# Altium PCB Bakplan2_Lynx.PcbDoc
Units mm, origin at the board's own origin, x right, y up, seen from the top; angles counter-clockwise.
Board outline 145 x 75 mm, 2 copper layers (Top Layer, Bottom Layer); 6 components, 64 nets, 260 pads, 0 vias.
Unrouted connection lines stored in the file: 1.
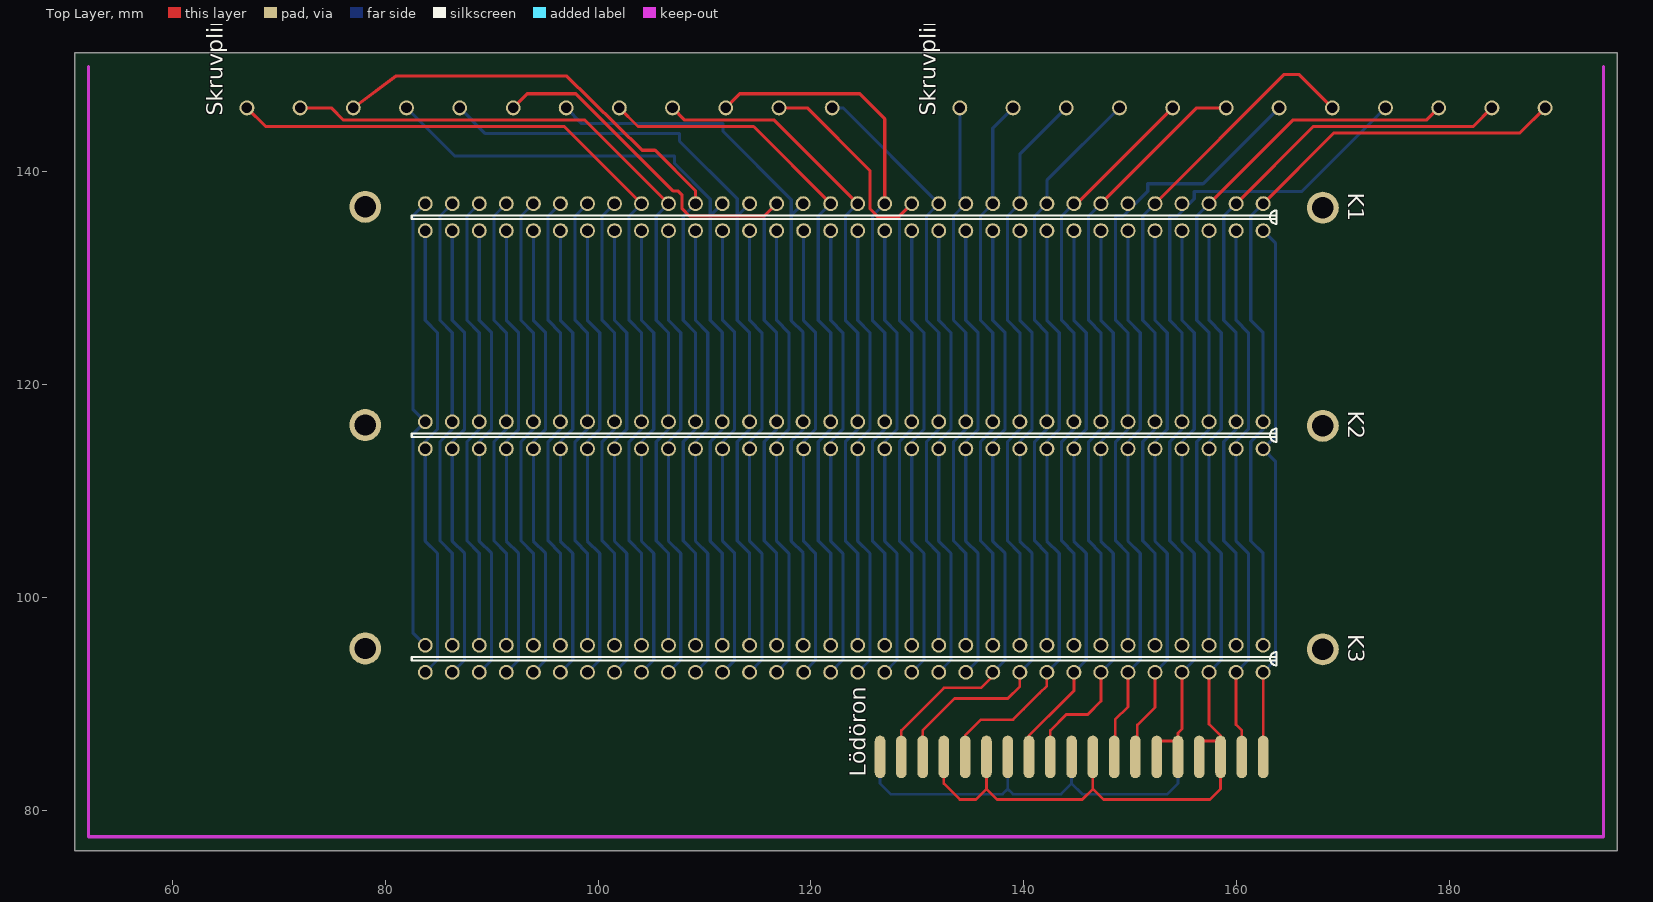
[diagram p0: Top Layer view]
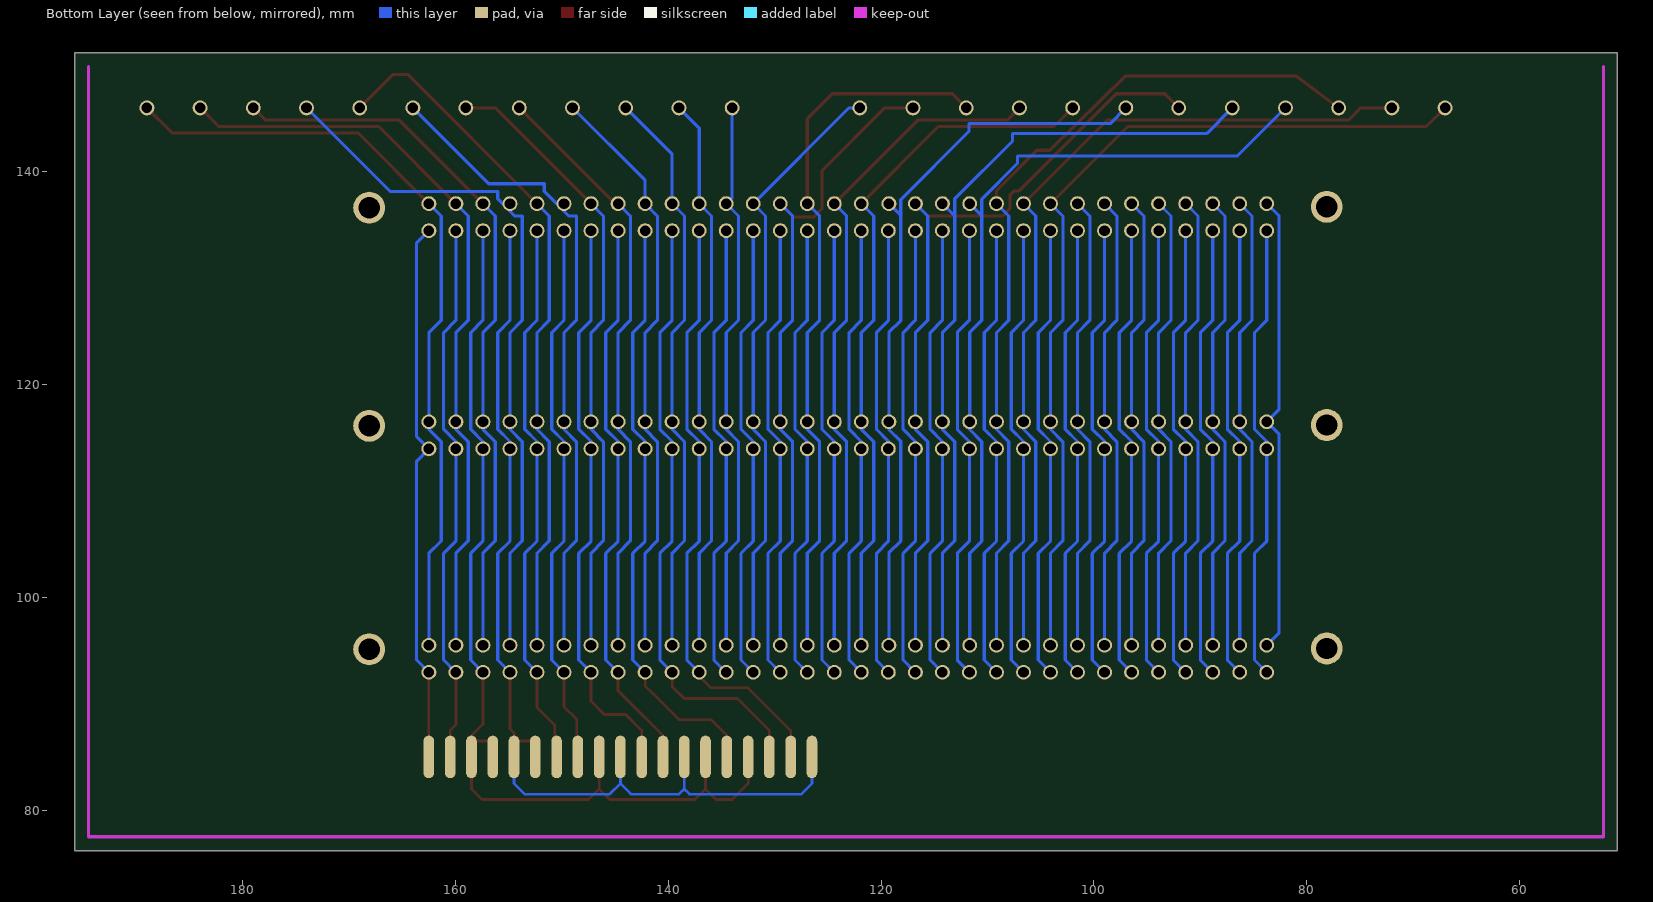
[diagram p1: Bottom Layer view, seen from below]

## Layer stack, top to bottom
Top Layer: signal copper 0.0356
Dielectric: dielectric 0.32, FR-4, Dk 4.8
Bottom Layer: signal copper 0.0356

## Board outline
50.8,76.2 195.8,76.2 195.8,151.2 50.8,151.2

## Design rules (kind name [scope] priority, off if disabled: settings)
Clearance [All] p1: gap=0.3
ComponentClearance [All] p1: gap=0.254 collisioncheckmode=0
PolygonConnect [All] p1: connectstyle=Relief reliefconductorwidth=0.254 reliefentries=4 polygonreliefangle="90 Angle"
RoomDefinition Schema2_bakplan_Lynx [InComponentClass('Schema2_bakplan_Lynx')] p1: confinementstyle=ConfineIn formatcopy=TRUE outline 198.5,79 262.499,79 262.499,176.5 198.5,176.5
RoutingLayers [All] p1: top layer=Horizontal bottom layer=Vertical
RoutingVias [All] p1: holewidth=0.8 width=1.6 viastyle="Through Hole" minholewidth=0.711 minwidth=1.27 maxholewidth=0.711 maxwidth=1.27
SolderMaskExpansion [All] p1: expansion=0.102
TestPointUsage [All] p1: valid=0 allowmultiple=FALSE
Testpoint [All] p1: side=15 testpointundercomponent=TRUE minsize=1.016 maxsize=2.54 preferedsize=1.524 minholesize=0 maxholesize=1.016 preferedholesize=0.813 testpointgrid=0.025 style=1023 order=-539222988
Width [All] p1: maxlimit=0.3 minlimit=0.3 preferedwidth=0.3
16 further rules are at their usual default settings.

## Components (designator, comment, footprint, x,y, rotation, side; value= is the part's Value field where it differs from the comment)
K1 "Header 32X2" DIN41612_EuropadonB64_Hyls 162.5,137 r270 top
K2 "Header 32X2" DIN41612_EuropadonB64_Hyls 162.5,116.5 r270 top
K3 "Header 32X2" DIN41612_EuropadonB64_Hyls 162.5,95.5 r270 top
Lödöron "MHDR1X19" Lödöron_19 162.5,85 r180 top
Skruvplint-1 "MHDR1X12" Plint12 189,146 r180 top
Skruvplint-2 "MHDR1X12" Plint12 122,146 r180 top

## Footprints (in the part's own frame and the unit in brackets; to place one, negate y for a bottom-side part, rotate by r counter-clockwise, add the part's x,y. Pads: shape width x height; smd on the part's side, far side on the other; paste and mask are expansions set on the pad)
DIN41612_EuropadonB64_Hyls [mm]
  round 3 hole 2: 0(0.305,-84.379) 0(0.381,5.613)
  round 1.4 hole 1: 1(0,0) 2(2.54,0) 3(0,-2.54) 4(2.54,-2.54) 5(0,-5.08) 6(2.54,-5.08) 7(0,-7.62) 8(2.54,-7.62) 9(0,-10.16) 10(2.54,-10.16) 11(0,-12.7) 12(2.54,-12.7) 13(0,-15.24) 14(2.54,-15.24) 15(0,-17.78) 16(2.54,-17.78) 17(0,-20.32) 18(2.54,-20.32) 19(0,-22.86) 20(2.54,-22.86) 21(0,-25.4) 22(2.54,-25.4) 23(0,-27.94) 24(2.54,-27.94) 25(0,-30.48) 26(2.54,-30.48) 27(0,-33.02) 28(2.54,-33.02) 29(0,-35.56) 30(2.54,-35.56) 31(0,-38.1) 32(2.54,-38.1) 33(0,-40.64) 34(2.54,-40.64) 35(0,-43.231) 36(2.54,-43.18) 37(0,-45.72) 38(2.54,-45.72) 39(0,-48.26) 40(2.54,-48.26) 41(0,-50.825) 42(2.54,-50.8) 43(0,-53.34) 44(2.54,-53.34) 45(0,-55.88) 46(2.54,-55.88) 47(0,-58.42) 48(2.54,-58.42) 49(0,-60.96) 50(2.54,-60.96) 51(0,-63.5) 52(2.54,-63.5) 53(0,-66.04) 54(2.54,-66.04) 55(0,-68.58) 56(2.54,-68.58) 57(0,-71.12) 58(2.54,-71.12) 59(0,-73.66) 60(2.54,-73.66) 61(0,-76.2) 62(2.54,-76.2) 63(0,-78.74) 64(2.54,-78.74)
  silkscreen extent 0.63,-80.01 1.91,1.27
Lödöron_19 [mm]
  oval 1x4 smd: A1(0,0) A2(2,0) A3(4,0) A4(6,0) A5(8,0) A6(10,0) A7(12,0) A8(14,0) A9(16,0) A10(18,0) A11(20,0) A12(22,0) A13(24,0) A14(26,0) A15(28,0) A16(30,0) A17(32,0) A18(34,0) A19(36,0)
  oval 1x4 smd far side: B1(0,0) B2(2,0) B3(4,0) B4(6,0) B5(8,0) B6(10,0) B7(12,0) B8(14,0) B9(16,0) B10(18,0) B11(20,0) B12(22,0) B13(24,0) B14(26,0) B15(28,0) B16(30,0) B17(32,0) B18(34,0) B19(36,0)
Plint12 [mm]
  round 1.4 hole 1: 1(0,0) 2(5,0) 3(10,0) 4(15,0) 5(20,0) 6(25,0) 7(29.972,0) 8(35,0) 9(40,0) 10(45,0) 11(50,0) 12(55,0)

## Part data
K1 K2 K3: library part "Header 30X2", "Header, 30-Pin, Dual row"
Lödöron: "Header, 19-Pin"
Skruvplint-1 Skruvplint-2: "Header, 12-Pin"

## Nets (pads, with @x,y where several pads share a name; then routed paths per layer and width w, separated by ;. In a path a pad name is that pad's centre, name@x,y a point inside that pad or via, vN(x,y) a via of type N, cw(c..) or ccw(c..) an arc to the next point about the centre after c; other vN are vias at no path point)
A1: K1.1 K2.1 K3.1 Skruvplint-1.1 | length 73.6
  Top Layer w0.3: K1.1 169.137,143.637 186.637,143.637 Skruvplint-1.1
  Bottom Layer w0.3: K3.1 162.5,104.14 161.341,105.299 161.341,114.63 162.5,115.789 K2.1 162.5,124.876 161.341,126.035 161.341,135.841 K1.1
A2: K1.3 K2.3 K3.3 Skruvplint-1.2 | length 71.2
  Top Layer w0.3: K1.3 167.207,144.247 182.247,144.247 Skruvplint-1.2
  Bottom Layer w0.3: K3.3 159.96,104.149 158.801,105.308 158.801,114.639 159.96,115.799 K2.3 159.96,124.876 158.801,126.035 158.801,135.841 K1.3
A3: K1.5 K2.5 K3.5 Skruvplint-1.3 | length 68.7
  Top Layer w0.3: K1.5 165.27,144.85 177.85,144.85 Skruvplint-1.3
  Bottom Layer w0.3: K3.5 157.42,104.149 156.261,105.308 156.261,114.639 157.42,115.799 K2.5 157.42,124.876 156.261,126.035 156.261,135.841 K1.5
A4: K1.7 K2.7 K3.7 Skruvplint-1.4 | length 67.4
  Bottom Layer w0.3: K3.7 154.88,104.149 153.721,105.308 153.721,114.639 154.88,115.799 K2.7 154.88,124.876 153.721,126.035 153.721,135.841 154.424,135.841 154.88,136.296 ; K1.7 154.88,136.296 ; Skruvplint-1.4 166.151,138.151 156.031,138.151 156.031,137.447 155.232,136.648 154.88,136.296
A5: K1.9 K2.9 K3.9 Skruvplint-1.5 | length 66.4
  Top Layer w0.3: K1.9 164.489,149.149 165.851,149.149 Skruvplint-1.5
  Bottom Layer w0.3: K3.9 152.34,104.149 151.181,105.308 151.181,114.639 152.34,115.799 K2.9 152.34,124.876 151.181,126.035 151.181,135.841 K1.9
A6: K1.11 K2.11 K3.11 Skruvplint-1.6 | length 62.5
  Bottom Layer w0.3: K3.11 149.8,104.149 148.641,105.308 148.641,114.639 149.8,115.799 K2.11 149.8,124.876 148.641,126.035 148.641,135.841 149.344,135.841 149.8,136.296 ; K1.11 149.8,136.296 ; Skruvplint-1.6 156.862,138.862 151.662,138.862 151.662,138.158 150.152,136.648 149.8,136.296
A7: K1.13 K2.13 K3.13 Skruvplint-1.7 | length 58.9
  Top Layer w0.3: K1.13 156.26,146 Skruvplint-1.7
  Bottom Layer w0.3: K3.13 147.26,104.149 146.101,105.308 146.101,114.639 147.26,115.799 K2.13 147.26,124.876 146.101,126.035 146.101,135.841 K1.13
A8: K1.15 K2.15 K3.15 Skruvplint-1.8 | length 56.4
  Top Layer w0.3: K1.15 145,137 Skruvplint-1.8
  Bottom Layer w0.3: K3.15 144.72,104.149 143.561,105.308 143.561,114.639 144.72,115.799 K2.15 144.72,124.876 143.561,126.035 143.561,135.841 K1.15
A9: K1.17 K2.17 K3.17 Skruvplint-1.9 | length 55.2
  Bottom Layer w0.3: K3.17 142.18,104.149 141.021,105.308 141.021,114.639 142.18,115.799 K2.17 142.18,124.876 141.021,126.035 141.021,135.841 K1.17 142.18,139.18 Skruvplint-1.9
A10: K1.19 K2.19 K3.19 Skruvplint-1.10 | length 54.2
  Bottom Layer w0.3: K3.19 139.64,104.149 138.481,105.308 138.481,114.639 139.64,115.799 K2.19 139.64,124.876 138.481,126.035 138.481,135.841 K1.19 139.64,141.64 Skruvplint-1.10
A11: K1.21 K2.21 K3.21 Skruvplint-1.11 | length 53.2
  Bottom Layer w0.3: K3.21 137.1,104.149 135.941,105.308 135.941,114.639 137.1,115.799 K2.21 137.1,124.876 135.941,126.035 135.941,135.841 K1.21 137.1,144.1 Skruvplint-1.11
A12: K1.23 K2.23 K3.23 Skruvplint-1.12 | length 52.7
  Bottom Layer w0.3: Skruvplint-1.12 134,137.56 K1.23 133.401,135.841 133.401,126.051 134.56,124.892 K2.23 134.56,115.799 133.401,114.639 133.401,105.308 134.56,104.149 K3.23
A13: K1.25 K2.25 K3.25 Skruvplint-2.1 | length 57.2
  Bottom Layer w0.3: Skruvplint-2.1 123.02,146 K1.25 130.861,135.841 130.861,126.051 132.02,124.892 K2.25 132.02,115.799 130.861,114.639 130.861,105.308 132.02,104.149 K3.25
A14: K1.27 K2.27 K3.27 Skruvplint-2.2 | length 62.8
  Top Layer w0.3: Skruvplint-2.2 119.659,146 125.552,140.106 125.552,136.525 126.34,135.738 128.218,135.738 K1.27
  Bottom Layer w0.3: K3.27 129.48,104.149 128.321,105.308 128.321,114.639 129.48,115.799 K2.27 129.48,124.876 128.321,126.035 128.321,135.841 K1.27
A15: K1.29 K2.29 K3.29 Skruvplint-2.3 | length 67.8
  Top Layer w0.3: Skruvplint-2.3 113.32,147.32 124.587,147.32 126.94,144.967 K1.29
  Bottom Layer w0.3: K3.29 126.94,104.149 125.781,105.308 125.781,114.639 126.94,115.799 K2.29 126.94,124.876 125.781,126.035 125.781,135.841 K1.29
A16: K1.31 K2.31 K3.31 Skruvplint-2.4 | length 64.5
  Top Layer w0.3: Skruvplint-2.4 108.15,144.85 116.55,144.85 K1.31
  Bottom Layer w0.3: K3.31 124.4,104.149 123.241,105.308 123.241,114.639 124.4,115.799 K2.31 124.4,124.876 123.241,126.035 123.241,135.841 K1.31
A17: K1.33 K2.33 K3.33 Skruvplint-2.5 | length 67
  Top Layer w0.3: Skruvplint-2.5 103.753,144.247 114.613,144.247 K1.33
  Bottom Layer w0.3: K3.33 121.86,104.149 120.701,105.308 120.701,114.639 121.86,115.799 K2.33 121.86,124.876 120.701,126.035 120.701,135.841 K1.33
A18: K1.35 K2.35 K3.35 Skruvplint-2.6 | length 70
  Bottom Layer w0.3: Skruvplint-2.6 98.474,144.526 111.743,144.526 111.743,143.797 118.161,137.379 118.161,135.892 ; K3.35 119.269,104.175 118.161,105.283 118.161,114.665 119.269,115.773 K2.35 119.269,124.901 118.161,126.009 118.161,135.892 ; K1.35 118.161,135.892
A19: K1.37 K2.37 K3.37 Skruvplint-2.7 | length 74.7
  Top Layer w0.3: Skruvplint-2.7 93.348,147.32 97.917,147.32 107.036,138.201 107.493,138.201 107.899,137.795 107.899,136.525 108.585,135.839 115.619,135.839 K1.37
  Bottom Layer w0.3: K3.37 116.78,104.149 115.621,105.308 115.621,114.639 116.78,115.799 K2.37 116.78,124.876 115.621,126.035 115.621,135.841 K1.37
A20: K1.39 K2.39 K3.39 Skruvplint-2.8 | length 75.1
  Bottom Layer w0.3: Skruvplint-2.8 89.414,143.586 107.654,143.586 107.654,142.883 113.081,137.456 113.081,135.841 ; K3.39 114.24,104.149 113.081,105.308 113.081,114.639 114.24,115.799 K2.39 114.24,124.876 113.081,126.035 113.081,135.841 ; K1.39 113.081,135.841
A21: K1.41 K2.41 K3.41 Skruvplint-2.9 | length 77.4
  Bottom Layer w0.3: Skruvplint-2.9 86.522,141.478 107.197,141.478 107.197,140.774 110.541,137.43 110.541,135.866 ; K3.41 111.675,104.149 110.541,105.283 110.541,114.639 111.675,115.773 K2.41 111.675,124.901 110.541,126.035 110.541,135.866 ; K1.41 110.541,135.866
A22: K1.43 K2.43 K3.43 Skruvplint-2.10 | length 66.2
  Top Layer w0.3: Skruvplint-2.10 81,149 ; 97,149 104.149,142.011 105.359,142.011 109.16,138.211 K1.43
  Bottom Layer w0.3: K3.43 109.16,104.149 108.001,105.308 108.001,114.639 109.16,115.799 K2.43 109.16,124.876 108.001,126.035 108.001,135.841 K1.43
A23: K1.45 K2.45 K3.45 Skruvplint-2.11 | length 81.8
  Top Layer w0.3: Skruvplint-2.11 74.93,146 76.08,144.85 98.77,144.85 K1.45
  Bottom Layer w0.3: K3.45 106.62,104.149 105.461,105.308 105.461,114.639 106.62,115.799 K2.45 106.62,124.876 105.461,126.035 105.461,135.841 K1.45
A24: K1.47 K2.47 K3.47 Skruvplint-2.12 | length 84.2
  Top Layer w0.3: Skruvplint-2.12 68.753,144.247 96.833,144.247 K1.47
  Bottom Layer w0.3: K3.47 104.08,104.149 102.921,105.308 102.921,114.639 104.08,115.799 K2.47 104.08,124.876 102.921,126.035 102.921,135.841 K1.47
A25: K1.49 K2.49 K3.49 | length 43.4
  Bottom Layer w0.3: K3.49 101.54,104.149 100.381,105.308 100.381,114.639 101.54,115.799 K2.49 101.54,124.876 100.381,126.035 100.381,135.841 K1.49
A26: K1.51 K2.51 K3.51 | length 43.4
  Bottom Layer w0.3: K3.51 99,104.149 97.841,105.308 97.841,114.639 99,115.799 K2.51 99,124.876 97.841,126.035 97.841,135.841 K1.51
A27: K1.53 K2.53 K3.53 | length 43.4
  Bottom Layer w0.3: K3.53 96.46,104.149 95.301,105.308 95.301,114.639 96.46,115.799 K2.53 96.46,124.876 95.301,126.035 95.301,135.841 K1.53
A28: K1.55 K2.55 K3.55 | length 43.4
  Bottom Layer w0.3: K3.55 93.92,104.149 92.761,105.308 92.761,114.639 93.92,115.799 K2.55 93.92,124.876 92.761,126.035 92.761,135.841 K1.55
A29: K1.57 K2.57 K3.57 | length 43.4
  Bottom Layer w0.3: K3.57 91.38,104.149 90.221,105.308 90.221,114.639 91.38,115.799 K2.57 91.38,124.876 90.221,126.035 90.221,135.841 K1.57
A30: K1.59 K2.59 K3.59 | length 43.4
  Bottom Layer w0.3: K3.59 88.84,104.149 87.681,105.308 87.681,114.639 88.84,115.799 K2.59 88.84,124.876 87.681,126.035 87.681,135.841 K1.59
A31: K1.61 K2.61 K3.61 | length 43.4
  Bottom Layer w0.3: K3.61 86.3,104.149 85.141,105.308 85.141,114.639 86.3,115.799 K2.61 86.3,124.876 85.141,126.035 85.141,135.841 K1.61
A32: K1.63 K2.63 K3.63 | length 43.4
  Bottom Layer w0.3: K3.63 82.601,96.659 82.601,115.341 K2.63 82.601,117.659 82.601,135.841 K1.63
B1: K1.2 K2.2 K3.2 | length 43.4
  Bottom Layer w0.3: K3.2 163.652,94.112 163.652,112.808 K2.2 163.652,115.112 163.652,133.308 K1.2
B2: K1.4 K2.4 K3.4 | length 43.4
  Bottom Layer w0.3: K3.4 161.112,94.112 161.112,104.131 159.96,105.283 K2.4 159.96,114.646 161.112,115.799 161.112,124.883 159.96,126.035 K1.4
B3: K1.6 K2.6 K3.6 | length 43.4
  Bottom Layer w0.3: K3.6 158.572,94.112 158.572,104.131 157.42,105.283 K2.6 157.42,114.646 158.572,115.799 158.572,124.883 157.42,126.035 K1.6
B4: K1.8 K2.8 K3.8 | length 43.4
  Bottom Layer w0.3: K3.8 156.032,94.112 156.032,104.131 154.88,105.283 K2.8 154.88,114.646 156.032,115.799 156.032,124.883 154.88,126.035 K1.8
B5: K1.10 K2.10 K3.10 | length 43.4
  Bottom Layer w0.3: K3.10 153.492,94.112 153.492,104.131 152.34,105.283 K2.10 152.34,114.646 153.492,115.799 153.492,124.883 152.34,126.035 K1.10
B6: K1.12 K2.12 K3.12 | length 43.4
  Bottom Layer w0.3: K3.12 150.952,94.112 150.952,104.131 149.8,105.283 K2.12 149.8,114.646 150.952,115.799 150.952,124.883 149.8,126.035 K1.12
B7: K1.14 K2.14 K3.14 | length 43.4
  Bottom Layer w0.3: K3.14 148.412,94.112 148.412,104.131 147.26,105.283 K2.14 147.26,114.646 148.412,115.799 148.412,124.883 147.26,126.035 K1.14
B8: K1.16 K2.16 K3.16 | length 43.4
  Bottom Layer w0.3: K3.16 145.872,94.112 145.872,104.131 144.72,105.283 K2.16 144.72,114.646 145.872,115.799 145.872,124.883 144.72,126.035 K1.16
B9: K1.18 K2.18 K3.18 | length 43.4
  Bottom Layer w0.3: K3.18 143.332,94.112 143.332,104.131 142.18,105.283 K2.18 142.18,114.646 143.332,115.799 143.332,124.883 142.18,126.035 K1.18
B10: K1.20 K2.20 K3.20 | length 43.4
  Bottom Layer w0.3: K3.20 140.792,94.112 140.792,104.131 139.64,105.283 K2.20 139.64,114.646 140.792,115.799 140.792,124.883 139.64,126.035 K1.20
B11: K1.22 K2.22 K3.22 | length 43.4
  Bottom Layer w0.3: K3.22 138.252,94.112 138.252,104.131 137.1,105.283 K2.22 137.1,114.646 138.252,115.799 138.252,124.883 137.1,126.035 K1.22
B12: K1.24 K2.24 K3.24 | length 43.4
  Bottom Layer w0.3: K3.24 135.712,94.112 135.712,104.131 134.56,105.283 K2.24 134.56,114.646 135.712,115.799 135.712,124.883 134.56,126.035 K1.24
B13: K1.26 K2.26 K3.26 | length 43.4
  Bottom Layer w0.3: K3.26 133.172,94.112 133.172,104.131 132.02,105.283 K2.26 132.02,114.646 133.172,115.799 133.172,124.883 132.02,126.035 K1.26
B14: K1.28 K2.28 K3.28 | length 43.4
  Bottom Layer w0.3: K3.28 130.632,94.112 130.632,104.131 129.48,105.283 K2.28 129.48,114.646 130.632,115.799 130.632,124.883 129.48,126.035 K1.28
B15: K1.30 K2.30 K3.30 | length 43.4
  Bottom Layer w0.3: K3.30 128.092,94.112 128.092,104.131 126.94,105.283 K2.30 126.94,114.646 128.092,115.799 128.092,124.883 126.94,126.035 K1.30
B16: K1.32 K2.32 K3.32 | length 43.4
  Bottom Layer w0.3: K3.32 125.552,94.112 125.552,104.131 124.4,105.283 K2.32 124.4,114.646 125.552,115.799 125.552,124.883 124.4,126.035 K1.32
B17: K1.34 K2.34 K3.34 | length 43.4
  Bottom Layer w0.3: K3.34 123.012,94.112 123.012,104.131 121.86,105.283 K2.34 121.86,114.646 123.012,115.799 123.012,124.883 121.86,126.035 K1.34
B18: K1.36 K2.36 K3.36 | length 43.3
  Bottom Layer w0.3: K3.36 120.421,94.061 120.421,104.156 119.32,105.258 K2.36 119.32,114.672 120.421,115.773 120.421,124.908 119.32,126.009 K1.36
B19: K1.38 K2.38 K3.38 | length 43.4
  Bottom Layer w0.3: K3.38 117.932,94.112 117.932,104.131 116.78,105.283 K2.38 116.78,114.646 117.932,115.799 117.932,124.883 116.78,126.035 K1.38
B20: K1.40 K2.40 K3.40 | length 43.4
  Bottom Layer w0.3: K3.40 115.392,94.112 115.392,104.131 114.24,105.283 K2.40 114.24,114.646 115.392,115.799 115.392,124.883 114.24,126.035 K1.40
B21: K1.42 K2.42 K3.42 | length 43.4
  Bottom Layer w0.3: K3.42 112.827,94.087 112.827,104.156 111.7,105.283 K2.42 111.7,114.646 112.827,115.773 112.827,124.908 111.7,126.035 K1.42
B22: K1.44 K2.44 K3.44 | length 43.4
  Bottom Layer w0.3: K3.44 110.312,94.112 110.312,104.131 109.16,105.283 K2.44 109.16,114.646 110.312,115.799 110.312,124.883 109.16,126.035 K1.44
B23: K1.46 K2.46 K3.46 | length 43.4
  Bottom Layer w0.3: K3.46 107.772,94.112 107.772,104.131 106.62,105.283 K2.46 106.62,114.646 107.772,115.799 107.772,124.883 106.62,126.035 K1.46
B24: K1.48 K2.48 K3.48 | length 43.4
  Bottom Layer w0.3: K3.48 105.232,94.112 105.232,104.131 104.08,105.283 K2.48 104.08,114.646 105.232,115.799 105.232,124.883 104.08,126.035 K1.48
B25: K1.50 K2.50 K3.50 | length 43.4
  Bottom Layer w0.3: K3.50 102.692,94.112 102.692,104.131 101.54,105.283 K2.50 101.54,114.646 102.692,115.799 102.692,124.883 101.54,126.035 K1.50
B26: K1.52 K2.52 K3.52 | length 43.4
  Bottom Layer w0.3: K3.52 100.152,94.112 100.152,104.131 99,105.283 K2.52 99,114.646 100.152,115.799 100.152,124.883 99,126.035 K1.52
B27: K1.54 K2.54 K3.54 | length 43.4
  Bottom Layer w0.3: K3.54 97.612,94.112 97.612,104.131 96.46,105.283 K2.54 96.46,114.646 97.612,115.799 97.612,124.883 96.46,126.035 K1.54
B28: K1.56 K2.56 K3.56 | length 43.4
  Bottom Layer w0.3: K3.56 95.072,94.112 95.072,104.131 93.92,105.283 K2.56 93.92,114.646 95.072,115.799 95.072,124.883 93.92,126.035 K1.56
B29: K1.58 K2.58 K3.58 | length 43.4
  Bottom Layer w0.3: K3.58 92.532,94.112 92.532,104.131 91.38,105.283 K2.58 91.38,114.646 92.532,115.799 92.532,124.883 91.38,126.035 K1.58
B30: K1.60 K2.60 K3.60 | length 43.4
  Bottom Layer w0.3: K3.60 89.992,94.112 89.992,104.131 88.84,105.283 K2.60 88.84,114.646 89.992,115.799 89.992,124.883 88.84,126.035 K1.60
B31: K1.62 K2.62 K3.62 | length 43.4
  Bottom Layer w0.3: K3.62 87.452,94.112 87.452,104.131 86.3,105.283 K2.62 86.3,114.646 87.452,115.799 87.452,124.883 86.3,126.035 K1.62
B32: K1.64 K2.64 K3.64 | length 43.4
  Bottom Layer w0.3: K3.64 84.912,94.112 84.912,104.131 83.76,105.283 K2.64 83.76,114.646 84.912,115.799 84.912,124.883 83.76,126.035 K1.64
pads on no net: K1.0 K2.0 K3.0 Lödöron.A1 Lödöron.A2 Lödöron.A3 Lödöron.A4 Lödöron.A5 Lödöron.A6 Lödöron.A7 Lödöron.A8 Lödöron.A9 Lödöron.A10 Lödöron.A11 Lödöron.A12 Lödöron.A13 Lödöron.A14 Lödöron.A15 Lödöron.A16 Lödöron.A17 Lödöron.A18 Lödöron.A19 Lödöron.B1 Lödöron.B2 Lödöron.B3 Lödöron.B4 Lödöron.B5 Lödöron.B6 Lödöron.B7 Lödöron.B8 Lödöron.B9 Lödöron.B10 Lödöron.B11 Lödöron.B12 Lödöron.B13 Lödöron.B14 Lödöron.B15 Lödöron.B16 Lödöron.B17 Lödöron.B18 Lödöron.B19
copper on no net: | length 184.7
  Top Layer w0.254: 81,149 97,149 ; 128.5,86.5 128.5,87.5 132.5,91.5 136,91.5 137.1,92.6 137.1,92.96 ; 130.5,86 130.5,87.5 133.5,90.5 134,90.5 138.5,90.5 139.64,91.64 139.64,92.96 ; 132.5,83.5 132.5,82.5 134,81 135.5,81 136.5,82 ; 134.5,87 136,88.5 139,88.5 140,89.5 141.5,91 142.18,91.68 142.18,92.96 ; 136.5,83.5 136.5,82 ; 140.5,87 144,90.5 144.72,91.22 144.72,91.28 144.72,92.96 ; 142.5,86 142.5,87.5 144,89 146.02,89 147.26,90.24 147.26,92.96 ; 146.5,83 146.5,84 146.5,82 ; 148.6,86.6 148.6,88.5 149.8,89.7 149.8,92.96 ; 150.68,86.68 150.68,88 152.34,89.66 152.34,92.96 ; 152.5,86.5 154.5,86.5 154.5,87.24 154.88,87.62 154.88,92.96 ; 156.5,86.5 158.5,86.5 ; 157.42,92.96 157.42,88.08 158.5,87 ; 158.5,83.5 158.5,82 157.5,81 147.5,81 146.5,82 ; 159.96,92.96 159.96,88.04 160.5,87.5 160.5,86.5 ; 162.5,86.5 162.5,92.96 ; 136.5,82 137.5,81 145.5,81 146.5,82
  Bottom Layer w0.254: 126.5,83.5 126.5,82.5 127.5,81.5 137,81.5 138,81.5 138.5,82 ; 138.5,83.5 138.5,82 ; 144.5,83.5 144.5,82.5 ; 154.5,83.5 154.5,82.5 153.5,81.5 145.5,81.5 144.5,82.5 ; 138.5,82 139,81.5 143.5,81.5 144.5,82.5

## Keep-outs
Keep-Out Layer:
  lines w0.3: 52.1,149.9 52.1,77.5 194.5,77.5 194.5,149.9

## Silkscreen, mask and mechanical layers (free items; w line width, h text height)
Drill Drawing:
  text ".LEGEND" at 200.88,81.28 h1.52
  text "Drill Drawing." at 200.88,78.74 h1.52

## Dimensions
52.1,77.5 to 194.5,77.5 on Mechanical 1
52.1,77.5 to 52.1,149.9 on Mechanical 1